# EAGLE board mx232 (EAGLE 8.1.0)
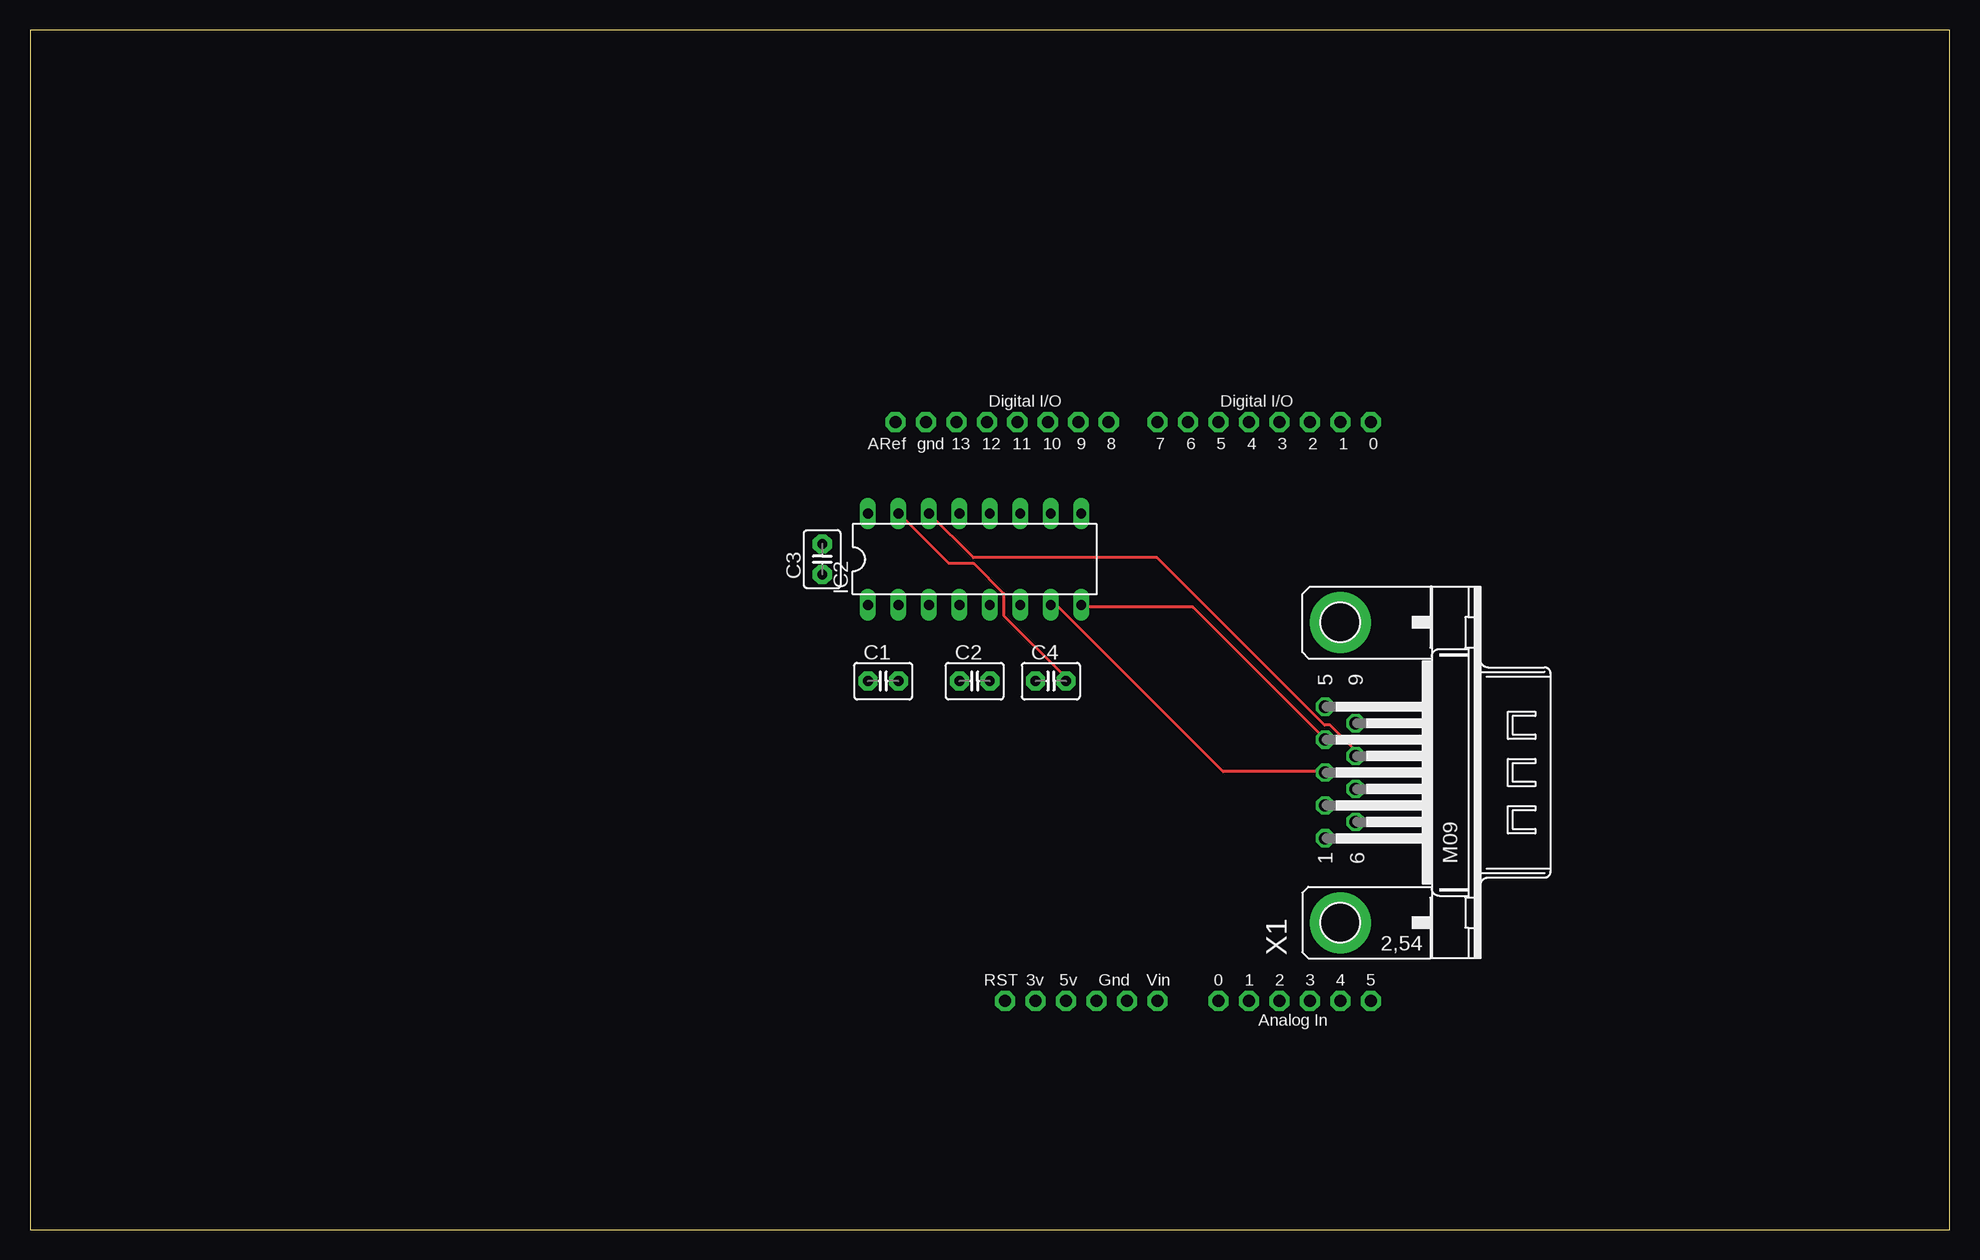
[diagram p0: board, top side]
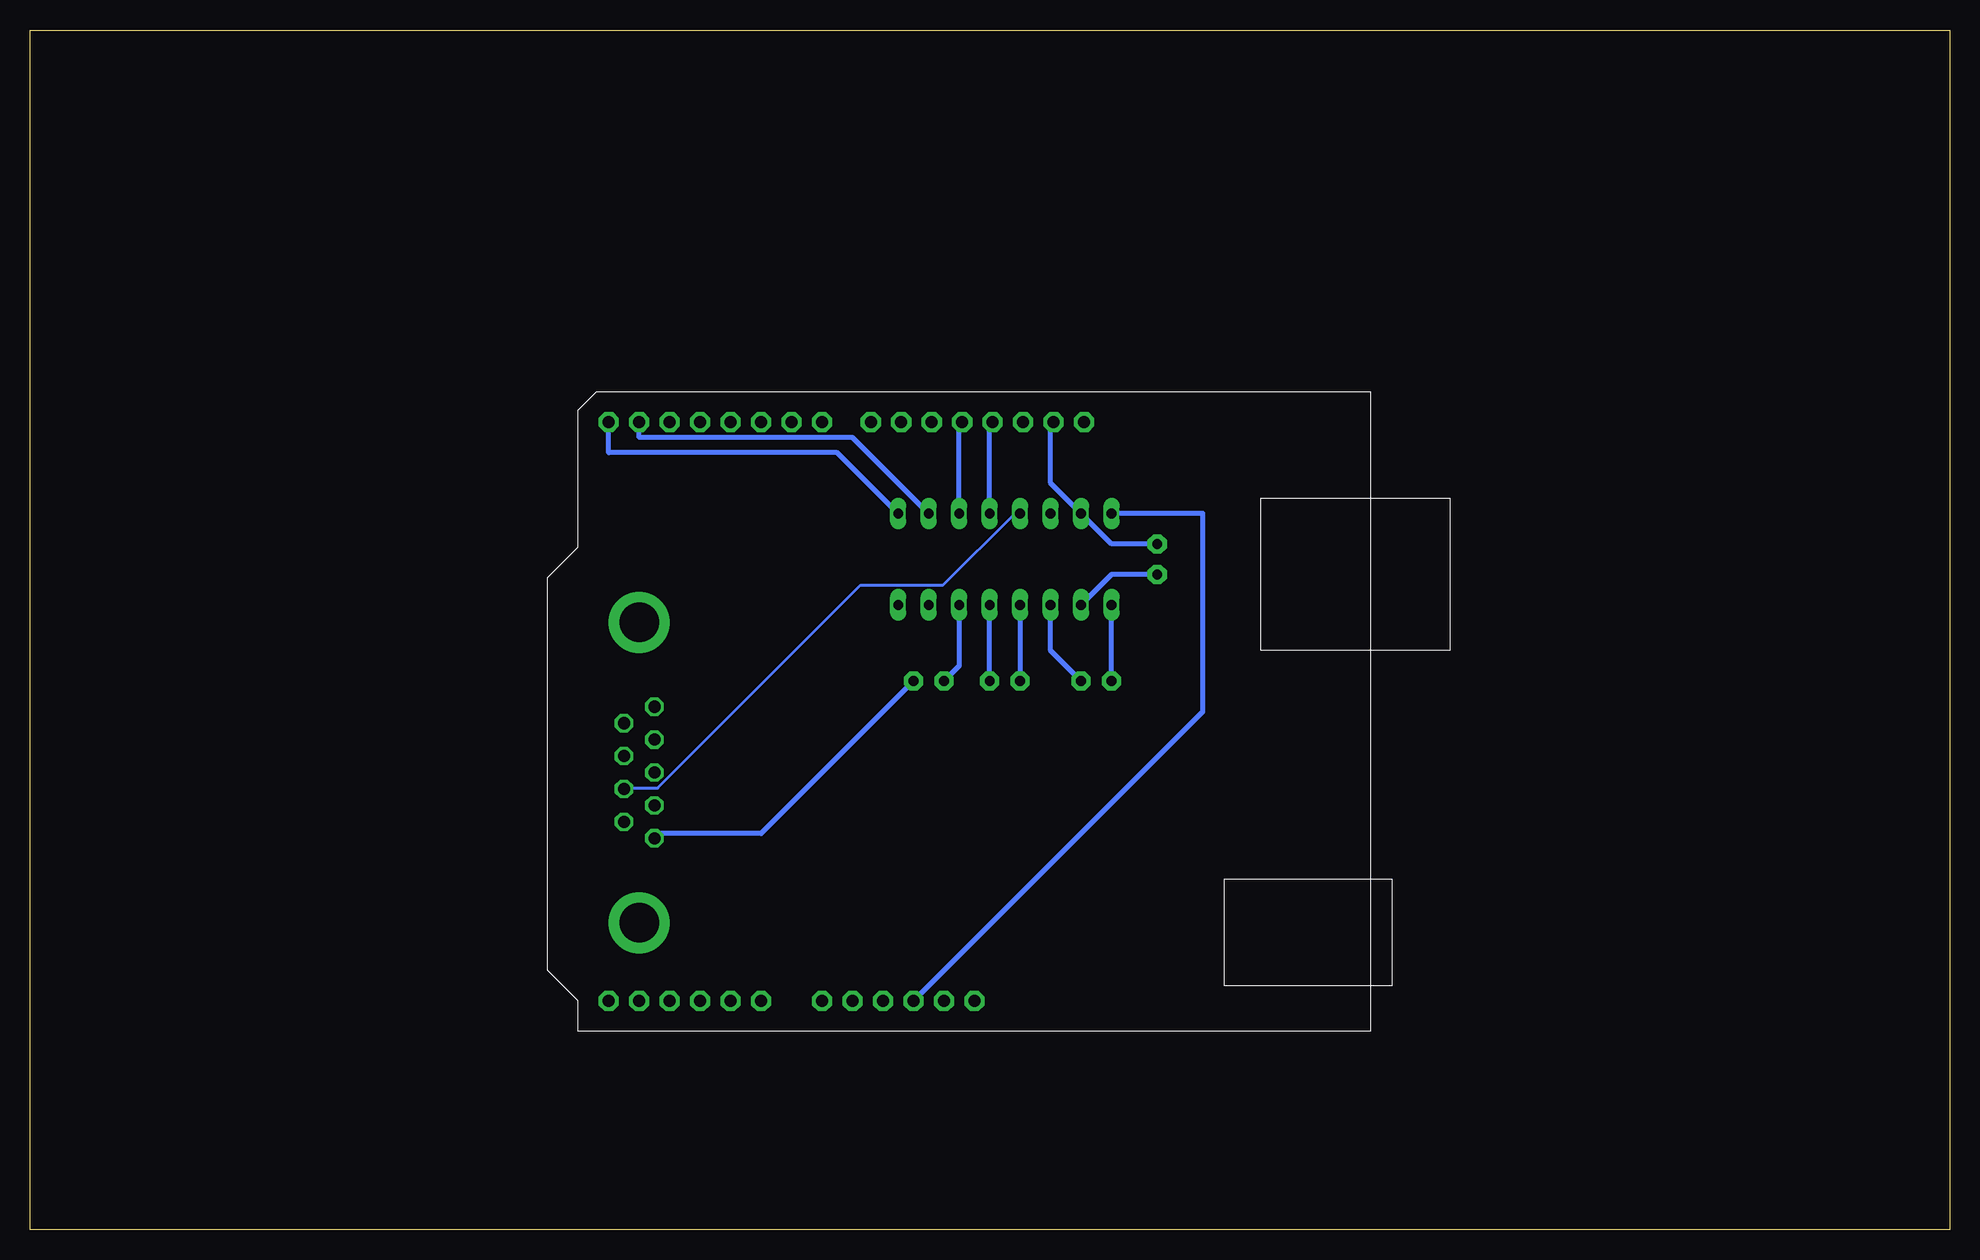
[diagram p1: board, bottom side, seen from below]

Size 160 x 100 mm. Coordinates in mm from the lower left corner, seen from the top.
Outline: 0,0 160,0 160,100 0,100 0,0
Copper layers (1*16): Top 0.035mm / dielectric 1.5mm / Bottom 0.035mm
Design rules "default": minimum track width 10mil, minimum drill 24mil, track to track 8mil, track to pad 8mil, pad to pad 8mil, via to via 8mil, smd to smd 8mil, copper to edge 40mil, drill to drill 8mil, minimum pad ring 10mil, minimum via ring 8mil, stop-mask expansion 4mil, vias tented up to drill 0mil, thermal gap 10mil

## Footprints (pad centres in the part's own frame; a part is rotated, then mirrored left to right if it is on the bottom)
C2.5-3 = drill 0.813 pad 1.6 octagon: 1 -1.27,0; 2 1.27,0
DIL16 = drill 0.813 long: 1 -8.89,-3.81; 2 -6.35,-3.81; 3 -3.81,-3.81; 4 -1.27,-3.81; 5 1.27,-3.81; 6 3.81,-3.81; 7 6.35,-3.81; 8 8.89,-3.81; 9 8.89,3.81; 10 6.35,3.81; 11 3.81,3.81; 12 1.27,3.81; 13 -1.27,3.81; 14 -3.81,3.81; 15 -6.35,3.81; 16 -8.89,3.81
ARDUINO-NOHOLE = drill 1 pad 1.676 octagon: 3V 35.56,2.54; 5V 38.1,2.54; A0 50.8,2.54; A1 53.34,2.54; A2 55.88,2.54; A3 58.42,2.54; A4 60.96,2.54; A5 63.5,2.54; AREF 23.876,50.8; D0 63.5,50.8; D1 60.96,50.8; D2 58.42,50.8; D3 55.88,50.8; D4 53.34,50.8; D5 50.8,50.8; D6 48.26,50.8; D7 45.72,50.8; D8 41.656,50.8; D9 39.116,50.8; D10 36.576,50.8; D11 34.036,50.8; D12 31.496,50.8; D13 28.956,50.8; GND 26.416,50.8; GND1 43.18,2.54; GND2 40.64,2.54; RESET 33.02,2.54; VIN 45.72,2.54
M09HP = drill 1.016 octagon: 1 -5.486,1.27; 2 -2.743,1.27; 3 0,1.27; 4 2.743,1.27; 5 5.486,1.27; 6 -4.115,-1.27; 7 -1.372,-1.27; 8 1.372,-1.27; 9 4.115,-1.27 | drill 3.302 pad 5.08: G1 -12.522,0; G2 12.522,0

## Placement (x,y rotation side)
C1  [C2.5-3]  71.12,45.72 0 top
C2  [C2.5-3]  78.74,45.72 0 top
C3  [C2.5-3]  66.04,55.88 90 top
C4  [C2.5-3]  85.09,45.72 0 top
IC2  MAX232  [DIL16]  78.74,55.88 0 top
U$1  ARDUINO-NOHOLE  [ARDUINO-NOHOLE]  48.26,16.51 0 top
X1  [M09HP]  109.22,38.1 90 top

## Library data of the parts
C1-C4 = capacitor-wima
IC2 = maxim; MF: MAXIM; MPN: MAX232ACPE+; OC_FARNELL: 9723773; OC_NEWARK: 68K4544
U$1 = adafruit
X1 = con-subd; OC_FARNELL: unknown; OC_NEWARK: unknown

## Nets
3V: U$1.3V
GND1: U$1.GND1
GND2: U$1.GND2
N$1: IC2.12 U$1.D12
N$2: IC2.9 U$1.D0
N$3: IC2.10 U$1.D1
N$4: IC2.11 U$1.D11
N$5: C1.1 IC2.1
N$6: C1.2 IC2.3
N$7: C2.1 IC2.4
N$8: C2.2 IC2.5
N$9: C3.1 IC2.2
N$10: C4.1 IC2.6
N$11: C3.2 C4.2 IC2.15 U$1.GND X1.1
N$12: IC2.16 U$1.5V
N$13: IC2.14 X1.8
N$14: IC2.7 X1.3
N$15: IC2.13 X1.7
N$16: IC2.8 X1.4
VIN: U$1.VIN

## Tracks (layer width: path | path; a pad name or v marks a point on that pad's centre or on a via)
N$1
  Bottom 0.254: U$1.D12 79.78,67.44 80.01,67.44 80.01,67.31
  Bottom 0.406: IC2.12 80.01,67.31
N$2
  Bottom 0.406: IC2.9 92.71,64.77 111.76,64.77 U$1.D0
N$3
  Bottom 0.406: IC2.10 91.44,66.04 109.22,66.04 U$1.D1
N$4
  Bottom 0.254: U$1.D11 82.3,67.44 82.53,67.44 82.55,67.31
  Bottom 0.406: IC2.11 82.55,67.31
N$5
  Bottom 0.406: C1.1 IC2.1
N$6
  Bottom 0.406: C1.2 74.93,48.26 IC2.3
N$7
  Bottom 0.406: IC2.4 C2.1
N$8
  Bottom 0.406: C2.2 IC2.5
N$9
  Bottom 0.406: C3.1 69.85,54.61 IC2.2
N$10
  Bottom 0.406: IC2.6 82.55,46.99 C4.1
N$11
  Top 0.254: C4.2 86.18,45.72 86.18,46.18 81.15,51.21 81.15,53.03 78.64,55.55 76.58,55.55 72.47,59.66 IC2.15
  Bottom 0.254: 107.9,33.02 107.9,32.69 X1.1 | U$1.GND 74.75,67.21 74.93,67.21
  Bottom 0.406: 74.93,67.31 74.93,67.21 74.93,62.23 IC2.15 69.85,57.15 C3.2 | C4.2 99.06,33.02 107.9,33.02 107.95,33.02
N$12
  Bottom 0.406: U$1.5V 62.23,43.18 62.23,59.69 IC2.16
N$13
  Top 0.254: IC2.14 74.98,59.66 78.64,56.01 93.95,56.01 107.9,42.06 108.36,42.06 110.41,40.01 110.41,39.55 X1.8
N$14
  Top 0.254: IC2.7 85.27,51.89 85.72,51.89 99.44,38.18 107.9,38.18 X1.3
N$15
  Bottom 0.254: IC2.13 77.5,59.66 77.95,59.66 83.9,53.72 90.75,53.72 107.67,36.8 110.41,36.8 X1.7
N$16
  Top 0.254: IC2.8 87.78,51.89 96.93,51.89 107.9,40.92 X1.4